# EAGLE board WetSensorV3 (EAGLE 9.4.1)
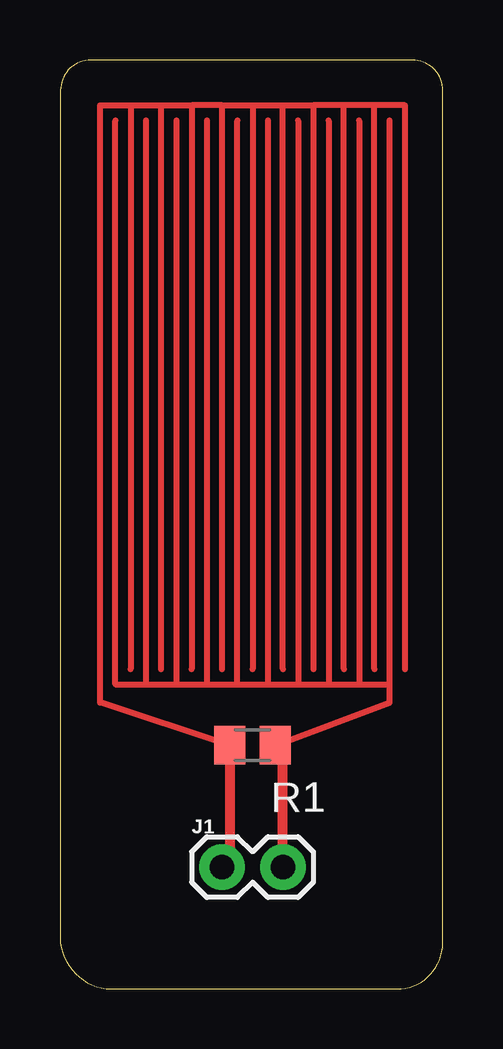
[diagram p0: board, top side]

Size 15.95 x 38.73 mm. Coordinates in mm from the lower left corner, seen from the top.
Outline: 0.02,37.45 0.02,2.54 arc90 1.93,0 14.04,0 arc90 15.95,1.91 15.95,37.45 arc90 14.68,38.73 1.29,38.73 arc90 0.02,37.45
Copper layers (1*16): Top 0.035mm / dielectric 1.5mm / Bottom 0.035mm
Design rules "default": minimum track width 10mil, minimum drill 24mil, track to track 8mil, track to pad 8mil, pad to pad 8mil, via to via 8mil, smd to smd 8mil, copper to edge 40mil, drill to drill 8mil, minimum pad ring 10mil, minimum via ring 8mil, stop-mask expansion 4mil, vias tented up to drill 0mil, thermal gap 10mil

## Footprints (pad centres in the part's own frame; a part is rotated, then mirrored left to right if it is on the bottom)
1X02 = drill 1.016 pad 1.88: 1 0,0; 2 2.54,0
M0805 = smd 1.3 x 1.6: 1 -0.95,0; 2 0.95,0

## Placement (x,y rotation side)
J1  [1X02]  6.75,5.08 0 top
R1  [M0805]  8.02,10.16 180 top

## Library data of the parts
J1 = SparkFun-Connectors
R1 = adafruit

## Nets
N$2: J1.1 R1.2
S$1: J1.2 R1.1

## Tracks (layer width: path | path; a pad name or v marks a point on that pad's centre or on a via)
N$1
  Top 0.254: 2.31,36.2 2.31,12.7 3.58,12.7 | 3.58,36.2 3.58,12.7 | 3.58,12.7 4.85,12.7 | 4.85,36.2 4.85,12.7 | 6.12,36.2 6.12,12.7 4.85,12.7
N$2
  Top 0.254: R1.2 1.67,11.94 1.67,36.83 2.94,36.83 | 2.94,36.83 2.94,13.34 | 4.21,13.34 4.21,36.83 | 4.21,36.83 5.48,36.83 | 5.48,36.83 5.48,13.34 | 6.75,13.34 6.75,36.83 5.48,36.83 | 2.94,36.83 4.21,36.83
  Top 0.406: J1.1 7.07,5.08 R1.2
N$3
  Top 0.254: 7.39,12.7 7.39,36.2 | 7.39,12.7 8.66,12.7 | 8.66,36.2 8.66,12.7 | 8.66,12.7 9.93,12.7 | 9.93,36.2 9.93,12.7 | 9.93,12.7 11.2,12.7 11.2,36.2 | 6.12,12.7 7.39,12.7
N$4
  Top 0.254: 8.02,36.83 8.02,13.34 | 9.29,13.34 9.29,36.83 | 9.29,36.83 10.56,36.83 | 10.56,36.83 10.56,13.34 | 11.83,13.34 11.83,36.83 10.56,36.83 | 8.02,36.83 9.29,36.83 | 6.75,36.83 8.02,36.83
N$5
  Top 0.254: 11.2,12.7 12.47,12.7 | 12.47,36.2 12.47,12.7 | 12.47,12.7 13.74,12.7
N$6
  Top 0.254: 13.1,13.34 13.1,36.83 | 13.1,36.83 11.83,36.83 | 14.37,36.83 13.1,36.83
S$1
  Top 0.254: 13.74,36.2 13.74,11.94 R1.1
  Top 0.406: R1.1 9.19,10.05 9.29,10.16 J1.2
S$2
  Top 0.254: 14.37,36.83 14.37,13.34